# Altium PCB MCU-main-board-PCBPcbDoc.PcbDoc (part 2 of 2)
Units mm, origin at the board's own origin, x right, y up, seen from the top; angles counter-clockwise.
Board outline 55 x 70 mm, 2 copper layers (Top Layer, Bottom Layer); 72 components, 81 nets, 304 pads, 97 vias.
Unrouted connection lines stored in the file: 15.
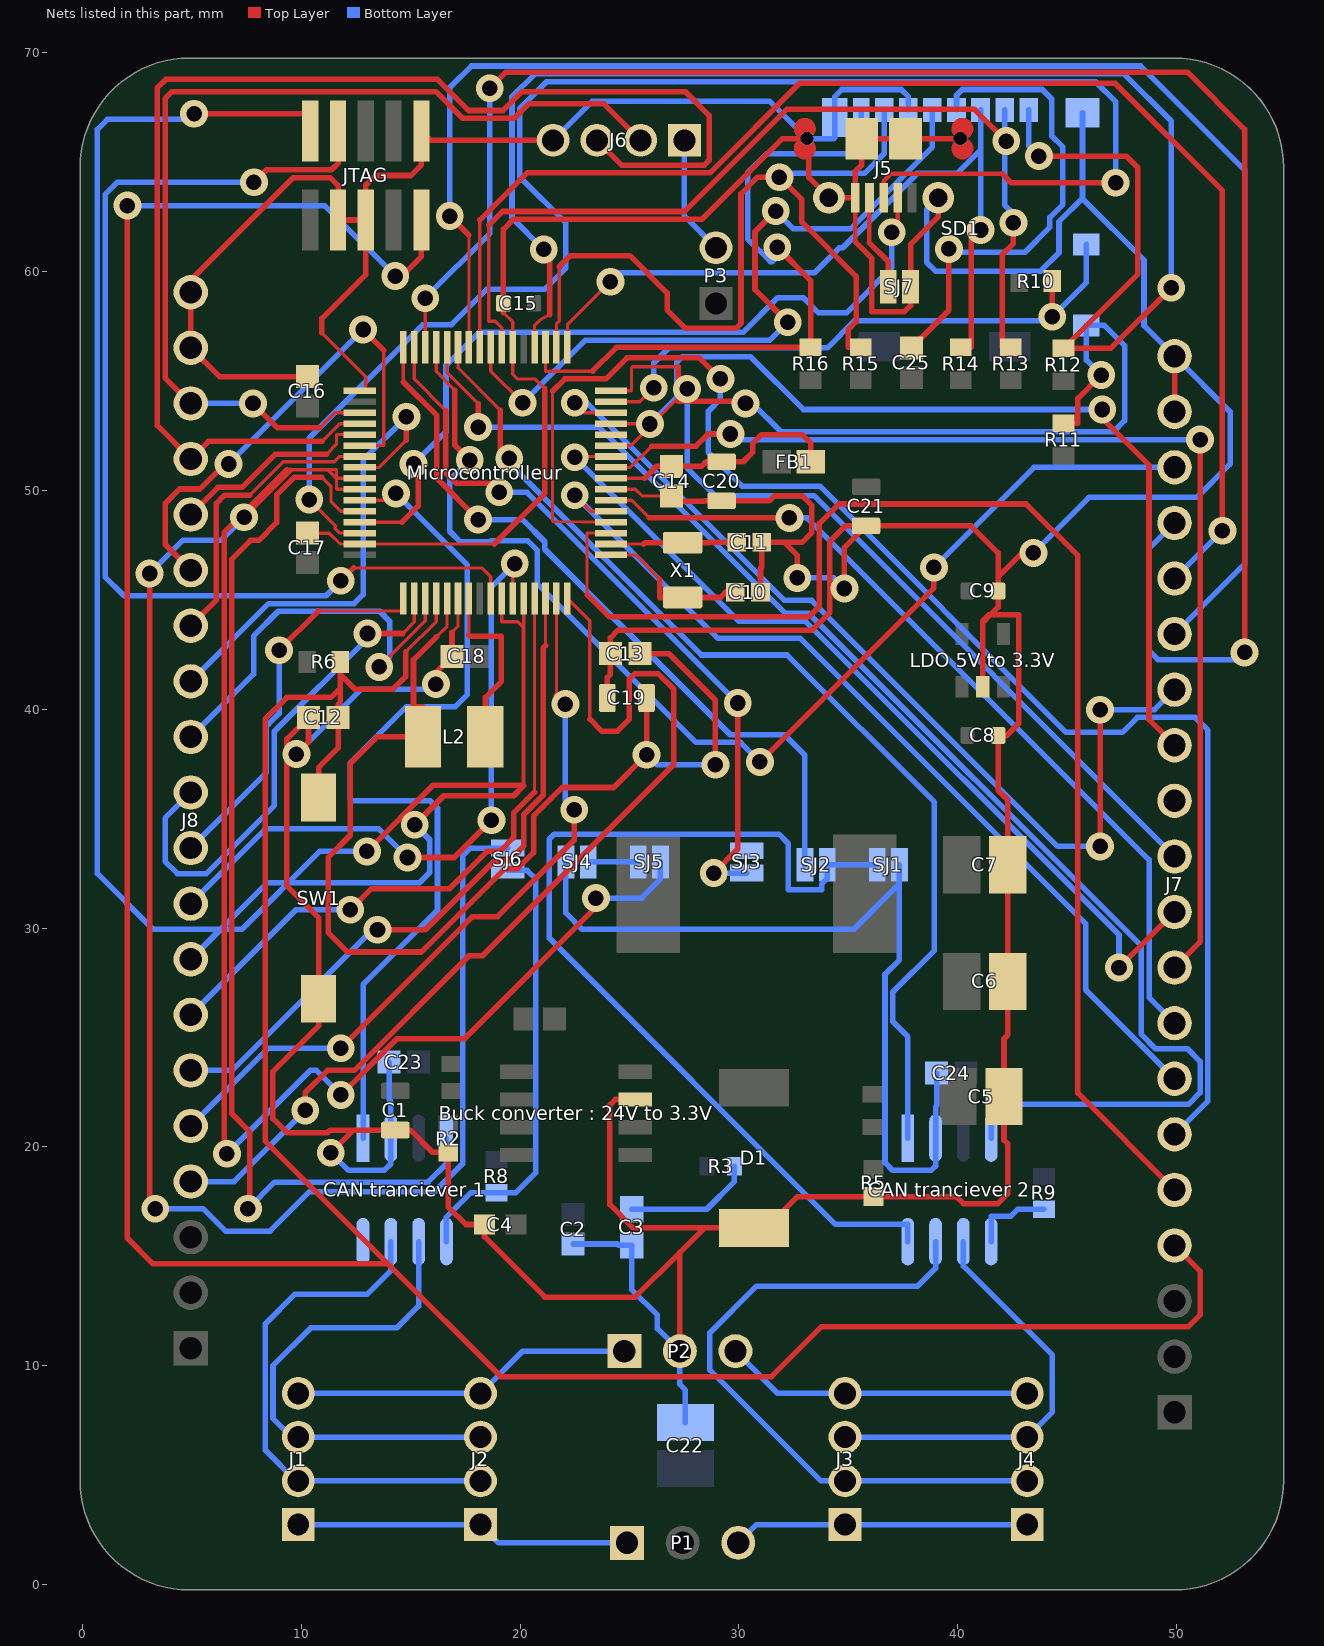
[diagram p2: the nets of this part, all layers, seen from the top]

## Via types
v1: diameter 1.27, hole 0.711, Top Layer to Bottom Layer, 97 vias

## Nets (pads, with @x,y where several pads share a name; then routed paths per layer and width w, separated by ;. In a path a pad name is that pad's centre, name@x,y a point inside that pad or via, vN(x,y) a via of type N, cw(c..) or ccw(c..) an arc to the next point about the centre after c; other vN are vias at no path point) (continued)
GND: "Buck converter : 24V to 3.3V.7" "CAN tranciever 1.2" "CAN tranciever 2.2" "LDO 5V to 3.3V.2" C1.1 C2.1 C3.2 C4.2 C5.2 C6.2 C7.2 C8.1 C9.1 C10.1 C11.1 C12.1 C13.1 C14.1 C15.1 C16.1 C17.1 C18.1 C19.1 C20.1 C21.1 C22.2 C23.1 C24.1 D1.2 J5.5 J5.6 J5.7 J5.8 J5.9 J5.10 J5.11 J6.4 J7.19 J7.20 J8.19 J8.20 JTAG.3 JTAG.5 JTAG.10 Microcontrolleur.7 Microcontrolleur.22 Microcontrolleur.33 Microcontrolleur.47 Microcontrolleur.54 P2.2 R2.1 R5.1 SD1.6 SD1.11 SD1.12 SJ1.1 SJ4.1 SJ7.1 SW1.2 | length 414.6
  Top Layer w0.15: C17.1@10.287,48.046 11.288,48.046 11.784,47.55 Microcontrolleur.47@12.677,47.55 18.821,47.55 ; 10.947,57.201 12.954,55.194 12.954,54.55 Microcontrolleur.33@12.677,54.55 ; 16.891,43.516 17.165,43.79 Microcontrolleur.54@17.165,45.062 ; 19.239,58.129 19.665,57.703 Microcontrolleur.22@19.665,56.538 19.665,55.311 19.888,55.087 20.701,55.087 21.133,54.656 ; Microcontrolleur.7@24.153,50.05 25.273,50.05 25.579,49.744 C14.1@26.924,49.744
  Top Layer w0.2: 35.316,61.367 J5.5@35.316,63.373
  Top Layer w0.25: J5.11@33.116,65.852 J5.11@33.116,66.073 ; J5.8@40.116,65.852 J5.8@40.116,66.073
  Top Layer w0.254: v1(9.779,37.948) 10.334,38.503 C12.1@10.334,39.624 9.349,38.639 9.349,31.926 10.795,30.48 SW1.2@10.795,26.774 10.795,25.527 8.705,23.437 8.705,21.292 9.347,20.65 11.201,20.65 11.321,20.77 12.388,20.77 ; C16.1@10.287,55.198 6.27,55.198 J8.19@4.953,56.515 4.953,57.785 J8.20@4.953,59.055 4.953,59.614 9.636,64.297 11.319,64.297 11.684,63.932 JTAG.3@11.684,62.357 JTAG.5@12.954,62.357 ; 10.947,57.201 10.947,57.861 12.954,59.868 JTAG.5@12.954,62.357 ; v1(11.354,19.736) 12.388,20.77 ; v1(16.154,41.148) 16.154,41.681 C18.1@16.891,42.418 16.891,43.516 ; 18.821,47.55 21.133,49.861 21.133,54.656 ; 19.239,58.129 C15.1@19.239,58.547 19.239,61.929 19.701,62.391 28.308,62.391 31.99,66.073 J5.11@33.116,66.073 ; J6.4@21.511,65.998 15.923,65.998 JTAG.10@15.494,66.427 15.494,64.872 15.011,64.389 13.386,64.389 12.954,63.957 JTAG.5@12.954,62.357 ; C19.1@23.992,40.513 23.992,41.453 24.13,41.591 C13.1@24.13,42.545 24.13,43.256 24.486,43.612 33.35,43.612 34.163,44.425 34.163,47.676 34.863,48.376 C21.1@35.814,48.376 ; 25.27,22.167 24.359,22.167 24.105,21.913 24.105,17.362 25.171,16.295 28.423,16.295 ; C14.1@26.924,49.744 27.163,49.505 28.423,49.505 28.437,49.519 C20.1@29.21,49.519 31.394,49.519 31.634,49.759 32.893,49.759 33.325,49.327 33.325,48.057 32.893,47.625 32.08,47.625 ; P2.2@27.305,10.668 27.305,15.177 ; C10.1@30.988,45.339 30.988,46.431 31.055,46.498 C11.1@31.055,47.625 32.08,47.625 ; v1(32.664,45.999) 32.664,47.041 32.08,47.625 ; 33.116,65.394 33.172,65.45 33.172,65.456 33.194,65.456 ; J5.11@33.116,65.852 33.116,65.623 33.266,65.623 33.198,65.456 ; v1(34.823,45.517) 34.823,47.385 C21.1@35.814,48.376 ; 35.316,61.367 36.068,60.615 36.068,58.166 37.567,58.166 37.846,58.445 SJ7.1@37.846,59.309 37.846,61.239 39.116,62.509 J5.6@39.116,63.373 ; J5.8@40.116,66.073 40.063,66.073 40.056,66.065 37.616,66.065 J5.9@37.616,66.073 J5.10@35.616,66.073 35.616,64.867 35.316,64.567 J5.5@35.316,63.373 J5.7@34.116,63.373 33.198,64.291 33.198,65.451 33.198,65.456 ; 41.148,41.029 41.148,43.967 ; v1(43.459,47.142) 42.94,47.142 41.848,46.05 ; J7.19@49.911,53.594 J7.20@49.911,56.134 ; 12.388,20.77 C1.1@14.303,20.77 14.986,20.77 16.002,19.754 R2.1@16.716,19.754 16.716,17.262 17.526,16.452 C4.2@18.367,16.452 18.367,15.898 21.133,13.132 25.259,13.132 27.305,15.177 ; 27.305,15.177 28.423,16.295 ; 28.423,16.295 D1.2@30.686,16.295 31.242,16.295 32.678,17.731 R5.1@36.147,17.731 39.936,17.731 40.259,17.408 41.834,17.408 42.291,17.865 42.291,20.135 42.116,20.31 C5.2@42.116,22.294 42.116,24.943 42.291,25.118 C6.2@42.291,27.559 C7.2@42.291,32.893 42.291,35.839 41.848,36.282 C8.1@41.848,38.8 42.24,38.8 42.799,39.359 42.799,44.323 41.504,44.323 ; 33.194,65.456 33.194,65.448 33.198,65.456 ; 33.194,65.456 33.198,65.456 ; C21.1@35.814,48.376 40.615,48.376 41.848,47.143 41.848,46.05 ; 41.148,43.967 41.504,44.323 ; 41.148,43.967 41.148,44.044 41.427,44.323 41.504,44.323 ; 41.504,44.323 41.848,44.667 C9.1@41.848,45.404 41.848,46.05
  Bottom Layer w0.254: v1(9.779,37.948) 12.751,40.919 15.926,40.919 v1(16.154,41.148) ; v1(11.354,19.736) 12.167,18.923 13.792,18.923 14.097,19.228 14.097,20.398 14.097,22.073 14.017,22.153 C23.1@14.017,23.876 ; J6.4@21.511,65.998 23.306,67.793 31.396,67.793 J5.11@33.116,66.073 34.337,66.073 34.384,66.121 SD1.12@34.384,67.039 34.384,67.996 34.708,68.32 37.421,68.32 37.745,67.996 SD1.6@37.745,67.388 ; SJ4.1@22.098,33.02 22.098,30.689 22.841,29.947 35.255,29.947 37.338,32.029 ; C2.1@22.431,15.563 24.436,15.563 24.5,15.499 C3.2@25.098,15.499 25.098,13.487 26.275,12.31 26.275,11.698 P2.2@27.305,10.668 27.305,9.144 27.559,8.89 C22.2@27.559,7.401 ; v1(32.664,45.999) 34.341,45.999 v1(34.823,45.517) ; SJ1.1@37.338,32.893 37.338,32.029 ; C24.1@39.036,23.368 39.036,21.891 38.989,21.844 38.989,20.398 38.989,19.126 38.786,18.923 37.033,18.923 36.679,19.277 36.679,27.889 37.338,28.548 37.338,32.029 ; J5.6@39.116,63.373 38.583,62.84 38.583,60.427 38.989,60.02 43.789,60.02 44.628,60.86 44.628,62.281 45.691,63.344 ; v1(43.459,47.142) 45.999,49.682 50.926,49.682 52.451,51.207 52.451,53.594 J7.20@49.911,56.134 48.514,57.531 48.514,60.522 45.691,63.344 ; 45.691,63.344 45.705,63.358 SD1.11@45.705,67.264 45.691,63.344
"NetBuck converter : 24V to 3.3V_1": "Buck converter : 24V to 3.3V.1" C26.2 | length 2.8
  Top Layer w0.254: 19.846,23.437 20.232,23.437 C26.2@20.232,25.85
"NetBuck converter : 24V to 3.3V_3": "Buck converter : 24V to 3.3V.3" R1.1 R2.2 | length 4.8
  Top Layer w0.254: R1.1@16.843,22.548 16.843,21.819 16.716,21.692 R2.2@16.716,21.005 18.212,21.005 18.32,20.897 19.846,20.897
"NetBuck converter : 24V to 3.3V_4": "Buck converter : 24V to 3.3V.4" C4.1 | length 3.2
  Top Layer w0.254: C4.1@19.821,16.452 19.821,18.009 19.846,18.034 19.846,19.627
"NetBuck converter : 24V to 3.3V_5": "Buck converter : 24V to 3.3V.5" R4.1 R5.2 | length 13.1
  Top Layer w0.254: 25.27,19.627 30.378,19.627 31.023,18.983 R5.2@36.147,18.983 R4.1@36.147,20.909
"NetBuck converter : 24V to 3.3V_6": "Buck converter : 24V to 3.3V.6" C2.2 R3.2 | length 11.9
  Top Layer w0.254: 25.27,20.897 28.176,20.897 v1(28.296,20.777)
  Bottom Layer w0.254: C2.2@22.431,16.913 24.637,19.119 R3.2@28.547,19.119 28.547,20.526 v1(28.296,20.777)
"NetBuck converter : 24V to 3.3V_8": "Buck converter : 24V to 3.3V.8" C26.1 D1.1 L1.1 | length 18.8
  Top Layer w0.254: C26.1@21.582,25.85 23.995,23.437 25.27,23.437 ; L1.1@25.863,31.565 25.863,24.03 25.27,23.437 ; D1.1@30.686,22.705 28.342,22.705 27.61,23.437 25.27,23.437
NetC3_1: C3.1 R3.1 | length 5.9
  Bottom Layer w0.254: C3.1@25.098,17.151 28.533,17.151 29.797,18.415 R3.1@29.797,19.119
NetC10_2: C10.2 Microcontrolleur.1 X1.1 | length 7.1
  Top Layer w0.15: Microcontrolleur.1@24.153,47.05 25.289,47.05 26.391,45.949
  Top Layer w0.254: 26.391,45.949 26.391,45.105 X1.1@27.432,45.105 29.152,45.105 29.386,45.339 C10.2@29.838,45.339
NetC11_2: C11.2 Microcontrolleur.2 X1.2 | length 5.8
  Top Layer w0.15: Microcontrolleur.2@24.153,47.55 25.655,47.55
  Top Layer w0.254: 25.655,47.55 25.71,47.605 X1.2@27.432,47.605 28.651,47.605 28.671,47.625 C11.2@29.905,47.625
NetC12_2: C12.2 J7.4 JTAG.9 Microcontrolleur.52 R6.2 SW1.1 | length 166
  Top Layer w0.15: 14.777,42.617 16.165,44.005 Microcontrolleur.52@16.165,45.062
  Top Layer w0.254: v1(2.057,63.017) 2.057,15.824 3.226,14.656 13.964,14.656 ; SW1.1@10.795,35.964 10.795,37.338 11.684,38.227 C12.2@11.684,39.624 11.684,40.208 11.787,40.311 11.787,40.972 ; R6.2@11.787,42.164 11.787,41.58 ; v1(14.3,59.792) 14.605,59.792 15.494,60.681 JTAG.9@15.494,62.357 ; 14.777,42.617 14.777,41.498 14.199,40.919 12.447,40.919 11.787,41.58 ; J7.4@49.911,15.494 51.079,14.326 51.079,12.319 50.546,11.786 33.782,11.786 31.496,9.5 19.121,9.5 13.964,14.656 ; 11.787,40.972 11.787,41.58 ; 11.787,40.972 11.354,40.538 9.342,40.538 8.351,39.548 8.351,20.269 13.964,14.656
  Bottom Layer w0.254: v1(2.057,63.017) 11.074,63.017 v1(14.3,59.792)
NetC13_2: C13.2 C19.2 L2.1 Microcontrolleur.53 | length 52.2
  Top Layer w0.15: 16.182,43.307 16.665,43.79 Microcontrolleur.53@16.665,45.062
  Top Layer w0.254: 16.182,43.307 15.131,42.256 15.131,40.119 15.563,40.119 L2.1@15.563,38.735 13.462,38.735 12.243,37.516 12.243,34.239 11.227,33.223 11.227,29.794 12.116,28.905 15.494,28.905 19.304,32.715 19.888,32.715 20.625,33.452 20.625,35.128 21.92,36.424 24.282,36.424 v1(25.782,37.924) C19.2@25.782,40.513 ; C13.2@25.48,42.545 26.797,42.545 28.931,40.411 v1(28.931,37.465)
  Bottom Layer w0.254: v1(25.782,37.924) 26.241,37.465 v1(28.931,37.465)
NetC14_2: C14.2 C20.2 FB1.2 Microcontrolleur.8 | length 11.2
  Top Layer w0.15: Microcontrolleur.8@24.153,50.55 25.679,50.55
  Top Layer w0.254: 25.679,50.55 26.223,51.094 C14.2@26.924,51.094 28.296,51.094 28.511,51.309 C20.2@29.21,51.309 30.202,51.309 30.632,51.74 30.632,52.146 31.039,52.553 32.893,52.553 33.288,52.158 FB1.2@33.288,51.308
NetC25_1: C25.1 SD1.4 | length 22
  Top Layer w0.254: C25.1@37.879,56.513 39.599,58.234 v1(39.599,61.036)
  Bottom Layer w0.254: v1(39.599,61.036) 39.757,60.878 43.064,60.878 44.213,62.027 44.213,62.475 44.806,63.068 44.806,65.684 44.298,66.192 44.298,67.888 43.866,68.32 40.208,68.32 39.944,68.056 SD1.4@39.944,67.388
"NetCAN tranciever 1_1": "CAN tranciever 1.1" Microcontrolleur.43 | length 41.3
  Top Layer w0.15: Microcontrolleur.43@12.677,49.55 14.015,49.55 v1(14.326,49.86)
  Bottom Layer w0.254: 12.827,20.398 12.827,27.418 16.229,30.82 16.229,35.484 15.897,35.816 12.317,35.816 12.243,35.89 12.243,37.543 14.819,40.119 17.043,40.119 17.595,40.671 17.595,46.591 v1(14.326,49.86)
"NetCAN tranciever 1_4": "CAN tranciever 1.4" Microcontrolleur.44 | length 50.3
  Top Layer w0.15: 10.947,50.597 11.36,50.184 11.36,49.501 11.811,49.05 Microcontrolleur.44@12.677,49.05
  Top Layer w0.254: v1(7.565,17.169) 7.643,17.247 7.643,20.701 6.831,21.513 6.831,46.863 7.683,47.715 8.067,47.715 8.876,48.523 8.876,49.795 9.677,50.597 10.947,50.597
  Bottom Layer w0.254: v1(7.565,17.169) 8.784,18.388 15.797,18.388 16.637,19.228 16.637,20.398
"NetCAN tranciever 1_5": "CAN tranciever 1.5" R8.2 SJ6.2 | length 20.9
  Bottom Layer w0.254: 16.637,15.67 16.637,16.789 17.755,17.907 R8.2@18.923,17.907 19.812,17.907 20.726,18.821 20.726,32.233 20.32,32.639 SJ6.2@19.431,32.639
"NetCAN tranciever 1_6": "CAN tranciever 1.6" J1.3 J2.3 | length 23
  Bottom Layer w0.254: 15.367,15.67 15.367,12.725 14.376,11.735 10.439,11.735 8.712,10.008 8.712,7.595 9.57,6.737 J1.3@9.864,6.737 14.021,6.737 J2.3@18.193,6.737
"NetCAN tranciever 1_7": "CAN tranciever 1.7" J1.2 J2.2 | length 24.3
  Bottom Layer w0.254: 14.097,15.67 14.097,14.351 13.005,13.259 9.703,13.259 8.357,11.913 8.357,6.147 9.766,4.737 J1.2@9.864,4.737 14.021,4.737 J2.2@18.193,4.737
"NetCAN tranciever 1_8": "CAN tranciever 1.8" SJ4.2 SJ5.2 | length 2.3
  Bottom Layer w0.254: SJ4.2@23.114,33.02 SJ5.2@25.4,33.02
"NetCAN tranciever 2_1": "CAN tranciever 2.1" Microcontrolleur.27 | length 48.5
  Top Layer w0.15: Microcontrolleur.27@17.165,56.538 17.165,55.601 19.101,53.665
  Top Layer w0.254: 19.101,53.665 19.101,51.867 v1(19.507,51.46)
  Bottom Layer w0.254: v1(19.507,51.46) 19.507,51.255 28.284,42.479 32.206,42.479 38.931,35.753 38.931,28.97 37.033,27.072 37.033,25.726 37.719,25.04 37.719,20.398
"NetCAN tranciever 2_4": "CAN tranciever 2.4" Microcontrolleur.28 | length 64.2
  Top Layer w0.15: Microcontrolleur.28@16.665,56.538 16.665,55.372 18.085,53.952
  Top Layer w0.254: v1(18.085,52.89) 18.085,53.952
  Bottom Layer w0.254: v1(18.085,52.89) 23.614,52.89 32.127,44.378 33.194,44.378 48.391,29.181 48.391,25.142 49.047,24.486 50.495,24.486 51.077,23.904 51.077,22.479 50.544,21.946 41.808,21.946 41.529,21.666 41.529,20.398
"NetCAN tranciever 2_5": "CAN tranciever 2.5" R9.2 SJ3.2 | length 3.7
  Bottom Layer w0.254: 41.529,15.67 41.529,16.84 42.431,16.84 42.736,17.145 R9.2@43.942,17.145
"NetCAN tranciever 2_6": "CAN tranciever 2.6" J3.3 J4.3 | length 19.4
  Bottom Layer w0.254: J3.3@34.851,6.737 J4.3@43.18,6.737 44.323,7.88 44.323,10.49 40.259,14.554 40.259,15.67
"NetCAN tranciever 2_7": "CAN tranciever 2.7" J3.2 J4.2 | length 31.1
  Bottom Layer w0.254: 38.989,15.67 38.989,14.453 38.176,13.64 30.81,13.64 28.677,11.506 28.677,9.804 33.744,4.737 J3.2@34.851,4.737 J4.2@43.18,4.737
"NetCAN tranciever 2_8": "CAN tranciever 2.8" SJ1.2 SJ2.2 | length 45.5
  Bottom Layer w0.254: SJ1.2@36.322,32.893 SJ2.2@34.036,32.893 34.036,32.258 33.782,32.004 33.782,31.75 32.258,31.75 32.258,33.858 31.826,34.29 21.565,34.29 21.336,34.061 21.336,29.54 34.417,16.459 37.719,16.459 37.719,15.67
NetJ1_1: J1.1 J2.1 P1.1 | length 15.4
  Bottom Layer w0.254: J1.1@9.864,2.737 J2.1@18.193,2.737 19.025,1.905 P1.1@24.892,1.905
NetJ1_4: J1.4 J2.4 P2.1 | length 15.7
  Bottom Layer w0.254: J1.4@9.864,8.737 J2.4@18.193,8.737 20.124,10.668 P2.1@24.765,10.668
NetJ3_1: J3.1 J4.1 P1.3 | length 13.6
  Bottom Layer w0.254: P1.3@29.972,1.905 30.804,2.737 J3.1@34.851,2.737 J4.1@43.18,2.737
NetJ3_4: J3.4 J4.4 P2.3 | length 14.1
  Bottom Layer w0.254: P2.3@29.845,10.668 31.776,8.737 J3.4@34.851,8.737 J4.4@43.18,8.737
NetJ5_2: J5.2 Microcontrolleur.45 | length 36.2
  Top Layer w0.15: Microcontrolleur.45@12.677,48.55 14.605,48.55
  Top Layer w0.2: v1(36.982,61.798) 37.266,62.082 J5.2@37.266,63.373
  Top Layer w0.254: 14.605,48.55 15.342,49.287 15.342,51.003 v1(15.138,51.206)
  Bottom Layer w0.254: v1(15.138,51.206) 16.616,52.684 16.616,55.715 18.124,57.223 30.191,57.223 31.771,58.803 32.949,58.803 33.636,58.115 34.925,58.115 36.982,60.173 v1(36.982,61.798)
NetJ5_3: J5.3 Microcontrolleur.46 | length 72.4
  Top Layer w0.15: v1(10.366,49.581) 11.557,48.39 11.557,48.253 11.76,48.05 Microcontrolleur.46@12.677,48.05
  Top Layer w0.2: J5.3@36.616,63.373 36.616,64.135 36.946,64.465 42.038,64.465
  Top Layer w0.254: 42.038,64.465 42.444,64.059 v1(47.215,64.059)
  Bottom Layer w0.254: v1(10.366,49.581) 10.366,52.385 15.56,57.578 16.869,57.578 18.486,59.195 21.137,59.195 22.098,60.156 22.098,62.217 19.988,64.327 19.988,67.461 21.201,68.674 46.304,68.674 47.215,67.763 v1(47.215,64.059)
NetJ5_4: J5.4 SJ7.2 | length 4.4
  Top Layer w0.2: 35.966,61.312 J5.4@35.966,63.373
  Top Layer w0.254: 35.966,61.312 36.83,60.448 SJ7.2@36.83,59.309
NetJ6_1: J6.1 P3.2 | length 5.5
  Bottom Layer w0.254: J6.1@27.511,65.998 27.511,62.532 P3.2@28.956,61.087
NetJ6_2: J6.2 J8.18 Microcontrolleur.35 | length 46.2
  Top Layer w0.15: 10.854,52.873 11.532,53.55 Microcontrolleur.35@12.677,53.55
  Top Layer w0.254: J8.18@4.953,53.975 3.785,55.143 3.785,67.918 4.091,68.224 16.154,68.224 17.372,67.007 19.737,67.007 20.396,67.666 23.843,67.666 J6.2@25.511,65.998 ; v1(7.798,53.975) 8.9,52.873 10.854,52.873
  Bottom Layer w0.254: J8.18@4.953,53.975 v1(7.798,53.975)
NetJ6_3: J6.3 J8.17 Microcontrolleur.36 | length 60.5
  Top Layer w0.15: 10.954,52.244 11.76,53.05 Microcontrolleur.36@12.677,53.05
  Top Layer w0.254: 10.954,52.244 5.762,52.244 J8.17@4.953,51.435 3.429,52.959 3.429,68.402 3.81,68.783 16.231,68.783 17.653,67.361 19.228,67.361 20.091,68.224 27.55,68.224 28.642,67.132 28.642,65.086 28.423,64.867 24.642,64.867 J6.3@23.511,65.998
NetJ7_5: J7.5 Microcontrolleur.3 | length 62.9
  Top Layer w0.15: 23.063,45.237 23.063,48.05 Microcontrolleur.3@24.153,48.05
  Top Layer w0.254: 23.063,45.237 24.084,44.217 33.193,44.217 33.68,44.704 33.68,48.489 34.569,49.378 43.129,49.378 45.491,47.015 45.491,22.454 J7.5@49.911,18.034
NetJ7_6: J7.6 Microcontrolleur.4 | length 68.7
  Top Layer w0.15: 21.487,54.532 21.487,48.577 Microcontrolleur.4@24.153,48.55
  Top Layer w0.254: 21.487,54.532 22.047,55.093 23.923,55.093 24.886,56.056 28.195,56.056 v1(29.158,55.093)
  Bottom Layer w0.254: v1(29.158,55.093) 29.158,54.173 28.6,53.614 28.6,51.74 30.145,50.195 33.703,50.195 44.958,38.939 47.523,38.939 48.208,39.624 50.851,39.624 51.431,39.044 51.431,22.094 J7.6@49.911,20.574
NetJ7_7: J7.7 Microcontrolleur.5 | length 42.2
  Top Layer w0.15: v1(22.504,49.777) 23.231,49.05 Microcontrolleur.5@24.153,49.05
  Bottom Layer w0.254: v1(22.504,49.777) 29.043,43.239 32.809,43.239 45.845,30.202 45.845,27.18 J7.7@49.911,23.114
NetJ7_8: J7.8 Microcontrolleur.6 | length 39.3
  Top Layer w0.15: Microcontrolleur.6@24.153,49.55 25.095,49.55 25.903,48.743
  Top Layer w0.254: 25.903,48.743 v1(32.309,48.743)
  Bottom Layer w0.254: v1(32.309,48.743) 33.122,48.743 48.745,33.119 48.745,26.82 J7.8@49.911,25.654
NetJ7_9: J7.9 Microcontrolleur.9 | length 52.3
  Top Layer w0.15: Microcontrolleur.9@24.153,51.05 25.04,51.05 26.01,52.019
  Top Layer w0.254: 26.01,52.019 28.042,52.019 28.6,52.578 v1(29.616,52.578) ; J7.9@49.911,28.194 51.079,29.362 v1(51.079,52.324)
  Bottom Layer w0.254: v1(29.616,52.578) 29.87,52.324 v1(51.079,52.324)
NetJ7_10: J7.10 Microcontrolleur.10 | length 40.7
  Top Layer w0.15: v1@22.543,51.55 Microcontrolleur.10@24.153,51.55
  Top Layer w0.254: v1(22.504,51.511) v1@22.543,51.55 ; v1(47.371,28.194) J7.10@49.911,30.734
  Bottom Layer w0.254: v1(22.504,51.511) 29.997,44.018 33.045,44.018 47.371,29.693 v1(47.371,28.194)
NetJ7_11: J7.11 Microcontrolleur.11 | length 37.8
  Top Layer w0.15: Microcontrolleur.11@24.153,52.05 25.05,52.05 v1(27.635,54.635)
  Bottom Layer w0.254: v1(27.635,54.635) 27.635,51.029 28.905,49.759 33.426,49.759 J7.11@49.911,33.274
NetJ7_12: J7.12 Microcontrolleur.12
NetJ7_13: J7.13 Microcontrolleur.13 | length 42.4
  Top Layer w0.15: Microcontrolleur.13@24.153,53.05 v1@25.919,53.05
  Top Layer w0.254: v1@25.919,53.05 v1(25.933,53.035) ; v1(46.609,53.696) 46.609,53.289 48.743,51.156 48.743,39.522 J7.13@49.911,38.354
  Bottom Layer w0.254: v1(25.933,53.035) 27.152,54.254 27.152,55.854 27.407,56.109 30.533,56.109 32.946,53.696 v1(46.609,53.696)
NetJ7_14: J7.14 Microcontrolleur.14 | length 44.3
  Top Layer w0.15: v1(22.504,54) 22.955,53.55 Microcontrolleur.14@24.153,53.55
  Top Layer w0.254: v1(46.507,33.731) v1(46.507,39.98)
  Bottom Layer w0.254: v1(22.504,54) 23.052,54 32.08,44.972 33.327,44.972 44.568,33.731 v1(46.507,33.731) ; v1(46.507,39.98) 48.997,39.98 J7.14@49.911,40.894
NetJ7_15: J7.15 Microcontrolleur.26 | length 73.5
  Top Layer w0.15: Microcontrolleur.26@17.665,56.538 17.665,61.659
  Top Layer w0.254: v1(16.789,62.535) 17.665,61.659
  Bottom Layer w0.254: v1(16.789,62.535) 16.789,68.402 17.78,69.393 48.362,69.393 53.111,64.643 53.111,46.634 J7.15@49.911,43.434
NetJ7_16: J7.16 Microcontrolleur.25 | length 63
  Top Layer w0.15: Microcontrolleur.25@18.165,56.538 18.165,62.355
  Top Layer w0.254: 18.165,62.355 20.323,64.513 28.673,64.513 32.766,68.605 47.193,68.605 52.095,63.703 v1(52.095,48.158)
  Bottom Layer w0.254: J7.16@49.911,45.974 v1(52.095,48.158)
NetJ7_17: J7.17 Microcontrolleur.30 | length 83.8
  Top Layer w0.15: Microcontrolleur.30@15.665,56.538 v1(15.665,58.782)
  Top Layer w0.254: v1(18.618,68.377) 19.355,69.113 50.495,69.113 53.111,66.497 v1(53.111,42.596)
  Bottom Layer w0.254: v1(15.665,58.782) 18.618,61.736 v1(18.618,68.377) ; J7.17@49.911,48.514 48.743,47.346 48.743,42.672 49.149,42.266 52.781,42.266 v1(53.111,42.596)
NetJ7_18: J7.18 Microcontrolleur.29 | length 54
  Top Layer w0.15: Microcontrolleur.29@16.165,56.538 16.165,55.438 17.018,54.585
  Top Layer w0.254: 17.018,54.585 17.018,52.07 v1(17.704,51.384) ; v1(30.963,37.592) 38.913,45.542 v1(38.913,46.482)
  Bottom Layer w0.254: v1(17.704,51.384) 16.789,50.47 16.789,48.133 17.272,47.65 18.644,47.65 18.694,47.701 20.345,47.701 20.777,47.269 20.777,45.745 28.042,38.481 30.074,38.481 v1(30.963,37.592) ; v1(38.913,46.482) 43.485,51.054 J7.18@49.911,51.054
NetJ8_4: J8.4 Microcontrolleur.64 | length 46.4
  Top Layer w0.15: Microcontrolleur.64@22.165,45.062 23.19,44.037 23.19,39.548
  Top Layer w0.254: v1(10.185,21.666) 10.185,22.479 11.201,23.495 12.428,23.495 17.666,28.733 18.294,28.733 27.026,37.465 27.026,40.919 26.314,41.631 25.248,41.631 24.994,41.377 24.994,39.548 24.435,38.989 23.749,38.989 23.19,39.548
  Bottom Layer w0.254: J8.4@4.953,18.415 6.934,18.415 v1(10.185,21.666)
NetJ8_5: J8.5 Microcontrolleur.63 | length 34.3
  Top Layer w0.15: v1@21.665,40.641 Microcontrolleur.63@21.665,45.062
  Top Layer w0.254: v1(11.811,24.511) 17.82,30.52 18.978,30.52 22.479,34.022 v1(22.479,35.408) ; v1@21.665,40.641 v1(22.073,40.234)
  Bottom Layer w0.254: J8.5@4.953,20.955 8.509,24.511 v1(11.811,24.511) ; v1(22.073,40.234) 22.073,35.814 v1(22.479,35.408)
NetJ8_6: J8.6 Microcontrolleur.62 | length 31.2
  Top Layer w0.15: 21.165,42.907 Microcontrolleur.62@21.165,45.062
  Top Layer w0.254: v1(13.487,29.921) 15.672,29.921 18.821,33.071 19.482,33.071 20.17,33.759 20.17,35.182 21.057,36.068 21.057,42.799 21.165,42.907
  Bottom Layer w0.254: J8.6@4.953,23.495 6.833,23.495 13.259,29.921 v1(13.487,29.921)
NetJ8_7: J8.7 Microcontrolleur.61 | length 29.4
  Top Layer w0.15: 20.665,36.214 Microcontrolleur.61@20.665,45.062
  Top Layer w0.254: v1(12.243,30.836) 13.208,31.801 16.789,31.801 18.491,33.503 19.075,33.503 19.71,34.138 19.71,35.259 20.665,36.214
  Bottom Layer w0.254: J8.7@4.953,26.035 9.754,30.836 v1(12.243,30.836)
NetJ8_8: J8.8 Microcontrolleur.60 | length 29.3
  Top Layer w0.15: 20.165,36.497 Microcontrolleur.60@20.165,45.062
  Top Layer w0.254: v1(15.189,34.722) 16.514,36.046 19.714,36.046 20.165,36.497
  Bottom Layer w0.254: J8.8@4.953,28.575 8.458,32.08 15.418,32.08 15.875,32.537 15.875,34.036 v1(15.189,34.722)
NetJ8_9: J8.9 Microcontrolleur.59 | length 30.2
  Top Layer w0.15: Microcontrolleur.59@19.665,45.062 v1@19.665,46.56
  Top Layer w0.254: v1(14.859,33.223) 16.993,33.223 v1(18.694,34.925) ; v1@19.665,46.56 v1(19.761,46.656)
  Bottom Layer w0.254: J8.9@4.953,31.115 8.367,34.529 13.553,34.529 v1(14.859,33.223) ; v1(18.694,34.925) 18.694,45.589 v1(19.761,46.656)
NetJ8_10: J8.10 Microcontrolleur.49 | length 17.8
  Top Layer w0.15: 10.787,44.493 14.665,44.493 Microcontrolleur.49@14.665,45.062
  Top Layer w0.254: v1(8.992,42.697) 10.787,44.493
  Bottom Layer w0.254: J8.10@4.953,33.655 8.409,37.111 8.409,39.323 8.509,39.323 8.992,39.806 v1(8.992,42.697)
NetJ8_11: J8.11 Microcontrolleur.50 | length 23.2
  Top Layer w0.15: 14.632,43.459 15.165,43.993 Microcontrolleur.50@15.165,45.062
  Top Layer w0.254: v1(13.03,43.459) 14.632,43.459
  Bottom Layer w0.254: J8.11@4.953,36.195 3.785,35.027 3.785,33.045 4.343,32.487 5.664,32.487 8.763,35.585 8.763,38.969 13.03,43.236 v1(13.03,43.459)
NetJ8_12: J8.12 Microcontrolleur.51 | length 19
  Top Layer w0.15: v1(13.564,41.935) 15.665,44.037 Microcontrolleur.51@15.665,45.062
  Bottom Layer w0.254: J8.12@4.953,38.735 7.823,41.605 7.823,43.346 8.952,44.475 13.589,44.475 14.046,44.018 14.046,42.418 v1(13.564,41.935)
NetJ8_13: J8.13 Microcontrolleur.40 | length 22.2
  Top Layer w0.15: Microcontrolleur.40@12.677,51.05 13.56,51.05 14.808,52.299
  Top Layer w0.254: 14.808,52.299 v1(14.808,53.365)
  Bottom Layer w0.254: J8.13@4.953,41.275 8.507,44.829 12.419,44.829 12.827,45.237 12.827,51.384 v1(14.808,53.365)
NetJ8_14: J8.14 Microcontrolleur.39 | length 13.5
  Top Layer w0.15: 7.655,49.784 9.176,51.305 11.515,51.305 11.76,51.55 Microcontrolleur.39@12.677,51.55
  Top Layer w0.254: J8.14@4.953,43.815 6.123,44.985 6.123,49.404 6.503,49.784 7.655,49.784
NetJ8_15: J8.15 Microcontrolleur.38 | length 22.6
  Top Layer w0.15: Microcontrolleur.38@12.677,52.05 13.767,52.05 13.767,56.413
  Top Layer w0.254: J8.15@4.953,46.355 3.787,47.521 3.787,49.405 4.445,50.063 5.366,50.063 6.509,51.206 v1(6.68,51.206) ; v1(12.827,57.353) 13.767,56.413
  Bottom Layer w0.254: v1(6.68,51.206) v1(12.827,57.353)
NetJ8_16: J8.16 Microcontrolleur.37 | length 9.5
  Top Layer w0.15: 11.171,51.659 11.61,52.098 11.61,52.529 11.631,52.55 Microcontrolleur.37@12.677,52.55
  Top Layer w0.254: J8.16@4.953,48.895 6.196,50.138 7.301,50.138 8.822,51.659 11.171,51.659
NetJTAG_2: JTAG.2 Microcontrolleur.58 | length 77.4
  Top Layer w0.15: Microcontrolleur.58@19.165,45.062 19.165,43.995 19.888,43.995 20.142,43.741 20.142,36.525
  Top Layer w0.254: v1(5.105,67.208) 10.414,67.208 JTAG.2@10.414,66.427 ; v1(13.005,33.503) 16.027,36.525 20.142,36.525
  Bottom Layer w0.254: v1(5.105,67.208) 4.851,66.954 1.143,66.954 0.686,66.497 0.686,32.487 3.226,29.947 7.29,29.947 10.846,33.503 v1(13.005,33.503)
NetJTAG_4: JTAG.4 Microcontrolleur.57 | length 49.9
  Top Layer w0.15: 12.395,46.457 18.259,46.457 18.665,46.05 Microcontrolleur.57@18.665,45.062
  Top Layer w0.254: v1(7.841,64.084) 8.407,64.651 11.387,64.651 11.684,64.948 JTAG.4@11.684,66.427 ; v1(11.811,45.872) 12.395,46.457
  Bottom Layer w0.254: v1(7.841,64.084) 1.6,64.084 1.041,63.525 1.041,46.05 1.905,45.187 11.125,45.187 v1(11.811,45.872)
NetL2_2: L2.2 Microcontrolleur.55 | length 8.1
  Top Layer w0.15: 17.665,43.383 Microcontrolleur.55@17.665,45.062
  Top Layer w0.254: 17.665,43.383 17.716,43.332 19.152,43.332 19.152,41.275 18.415,40.538 L2.2@18.415,38.735
NetMicrocontrolleur_15: Microcontrolleur.15 R10.2 SD1.9 | length 28
  Top Layer w0.15: Microcontrolleur.15@24.153,54.05 25.475,54.05 v1(26.111,54.686)
  Top Layer w0.254: v1(44.323,57.937) R10.2@44.323,59.563
  Bottom Layer w0.254: v1(26.111,54.686) 26.111,55.829 26.797,56.515 34.046,56.515 35.292,57.761 44.147,57.761 v1(44.323,57.937) 45.88,59.494 SD1.9@45.88,61.238
NetMicrocontrolleur_16: Microcontrolleur.16 R11.2 SD1.10 | length 38.3
  Top Layer w0.15: Microcontrolleur.16@24.153,54.55 25.095,54.55 25.095,55.599 25.146,55.65 27.229,55.65
  Top Layer w0.254: 27.229,55.65 27.229,54.077 30.201,54.077 v1(30.302,53.975) ; R11.2@44.831,53.074 45.491,53.074 45.491,54.204 v1(46.558,55.27)
  Bottom Layer w0.254: v1(30.302,53.975) 30.632,53.975 31.928,52.68 47.117,52.68 47.625,53.188 47.625,56.617 46.703,57.539 SD1.10@45.88,57.539 45.88,55.949 v1(46.558,55.27)
NetMicrocontrolleur_17: Microcontrolleur.17 R14.2 SD1.3 | length 34.7
  Top Layer w0.15: Microcontrolleur.17@22.165,56.538 22.165,57.573 v1(24.13,59.538)
  Top Layer w0.254: R14.2@40.14,56.539 40.615,56.539 40.615,61.47 v1(41.045,61.9)
  Bottom Layer w0.254: v1(24.13,59.538) 24.536,59.944 33.452,59.944 34.595,61.087 34.747,61.087 38.151,64.491 39.978,64.491 41.045,65.557 ; v1(41.045,61.9) 41.045,65.557 ; SD1.3@41.045,67.388 41.045,65.557
NetMicrocontrolleur_18: Microcontrolleur.18 R15.2 SD1.7 | length 39.3
  Top Layer w0.15: Microcontrolleur.18@21.665,56.538 21.665,57.606 21.793,57.734 21.793,60.223
  Top Layer w0.254: 21.793,60.223 22.301,60.731 25.019,60.731 26.721,59.03 26.721,58.242 27.559,57.404 29.87,57.404 30.099,57.633 30.099,63.551 30.861,64.313 v1(31.852,64.313) 32.877,63.288 32.877,62.255 35.357,59.775 35.357,57.709 35.001,57.353 35.001,56.539 R15.2@35.568,56.539
  Bottom Layer w0.254: v1(31.852,64.313) 32.029,64.491 35.738,64.491 36.644,65.397 SD1.7@36.644,67.388
NetMicrocontrolleur_19: Microcontrolleur.19 R16.2 SD1.8 | length 31.5
  Top Layer w0.15: Microcontrolleur.19@21.165,56.538 21.165,55.448 23.318,55.448
  Top Layer w0.254: 23.318,55.448 24.409,56.539 R16.2@33.282,56.539 33.282,59.584 v1(31.753,61.112)
  Bottom Layer w0.254: v1(31.753,61.112) 31.753,60.681 31.527,60.455 31.443,60.455 30.404,61.493 30.404,64.516 31.267,65.38 35.239,65.38 35.594,65.735 SD1.8@35.594,67.388
NetMicrocontrolleur_20: Microcontrolleur.20 R12.2 SD1.1 | length 74.4
  Top Layer w0.15: Microcontrolleur.20@20.665,56.538 20.665,57.546 20.904,57.785 21.361,58.039
  Top Layer w0.254: v1(21.082,61.011) 21.361,60.731 21.361,58.039 ; v1(43.713,65.278) 47.701,65.278 48.235,64.745 48.235,59.895 R12.2@44.831,56.491 46.991,56.491 v1(49.759,59.258)
  Bottom Layer w0.254: v1(21.082,61.011) 19.634,62.459 19.634,67.996 20.676,69.037 47.6,69.037 49.759,66.878 v1(49.759,59.258) ; SD1.1@43.245,67.388 43.245,65.747 v1(43.713,65.278)
NetMicrocontrolleur_23: Microcontrolleur.23 R13.2 SD1.2 | length 44.2
  Top Layer w0.15: 18.567,62.111 18.567,57.734 18.872,57.734 19.165,57.441 Microcontrolleur.23@19.165,56.538
  Top Layer w0.254: 18.567,62.111 19.202,62.745 27.516,62.745 32.182,67.412 40.767,67.412 v1(42.215,65.964) ; R13.2@42.426,56.539 42.037,56.539 42.037,60.777 42.545,61.285 v1(42.545,62.23)
  Bottom Layer w0.254: SD1.2@42.144,67.388 v1@42.144,66.034 ; v1(42.215,65.964) v1@42.144,66.034 ; v1(42.545,62.23) 42.545,62.642 42.144,63.043 v1@42.144,66.034
NetMicrocontrolleur_24: Microcontrolleur.24 SD1.5 | length 33.6
  Top Layer w0.15: Microcontrolleur.24@18.665,56.538 18.665,55.452 v1(20.117,54)
  Top Layer w0.254: v1(31.681,62.763) 30.737,61.819 30.737,59.179 v1(32.233,57.683)
  Bottom Layer w0.254: v1(20.117,54) 22.985,56.869 31.418,56.869 v1(32.233,57.683) ; v1(31.681,62.763) 32.494,61.951 35.103,61.951 38.845,65.692 SD1.5@38.845,67.388
NetMicrocontrolleur_31: Microcontrolleur.31 SJ3.1 | length 33.8
  Top Layer w0.15: Microcontrolleur.31@15.165,56.538 15.165,55.095 16.616,53.644
  Top Layer w0.254: 16.616,53.644 16.616,50.796 17.094,50.317 18.644,50.317 v1(19.05,49.911) ; v1(28.854,32.512) 29.947,33.604 v1(29.947,40.284)
  Bottom Layer w0.254: v1(19.05,49.911) 20.32,49.911 v1(29.947,40.284) ; v1(28.854,32.512) SJ3.1@30.353,32.512
NetMicrocontrolleur_32: Microcontrolleur.32 SJ2.1 | length 33.9
  Top Layer w0.15: 14.665,54.953 Microcontrolleur.32@14.665,56.538
  Top Layer w0.254: 14.665,54.953 16.197,53.422 16.197,50.554 v1(18.085,48.666)
  Bottom Layer w0.254: v1(18.085,48.666) 20.117,48.666 21.131,47.652 21.131,47.309 29.606,38.835 32.08,38.835 33.02,37.895 SJ2.1@33.02,32.893
NetMicrocontrolleur_41: Microcontrolleur.41 SJ6.1 | length 72.9
  Top Layer w0.15: 9.507,50.927 11.231,50.927 11.608,50.55 Microcontrolleur.41@12.677,50.55
  Top Layer w0.254: v1(3.073,46.203) 3.073,17.424 v1(3.327,17.17) ; v1(7.391,48.768) 7.391,48.811 9.507,50.927
  Bottom Layer w0.254: v1(3.073,46.203) 4.597,47.727 6.35,47.727 v1(7.391,48.768) ; v1(3.327,17.17) 5.531,17.17 6.549,16.153 8.581,16.153 10.386,17.958 16.104,17.958 17.374,19.228 17.374,33.299 17.729,33.655 SJ6.1@19.431,33.655
NetMicrocontrolleur_42: Microcontrolleur.42 SJ5.1 | length 63.7
  Top Layer w0.15: 9.346,50.951 11.61,50.951 11.61,50.05 Microcontrolleur.42@12.677,50.05
  Top Layer w0.254: v1(6.604,19.685) 6.477,19.812 6.477,48.082 9.346,50.951 ; v1(11.811,22.377) 14.376,24.943 17.455,24.943 23.47,30.957 v1(23.47,31.369)
  Bottom Layer w0.254: v1(6.604,19.685) 10.414,23.495 10.693,23.495 v1(11.811,22.377) ; v1(23.47,31.369) 25.552,31.369 26.416,32.233 SJ5.1@26.416,33.02
pads on no net: "LDO 5V to 3.3V.4" J5.1 JTAG.6 JTAG.7 JTAG.8 SD1.13 SD1.14

## Text inside footprints (layer, text, board x,y; h text height)
J5: Mechanical 1 "PCB EDGE" at 43.816,67.623 h0.3 r180